# Altium PCB PCB1.PcbDoc
Units mil, origin at the board's own origin, x right, y up, seen from the top; angles counter-clockwise.
Board outline 1245 x 1560 mil, 2 copper layers (Top Layer, Bottom Layer); 11 components, 17 nets, 55 pads, 5 vias.
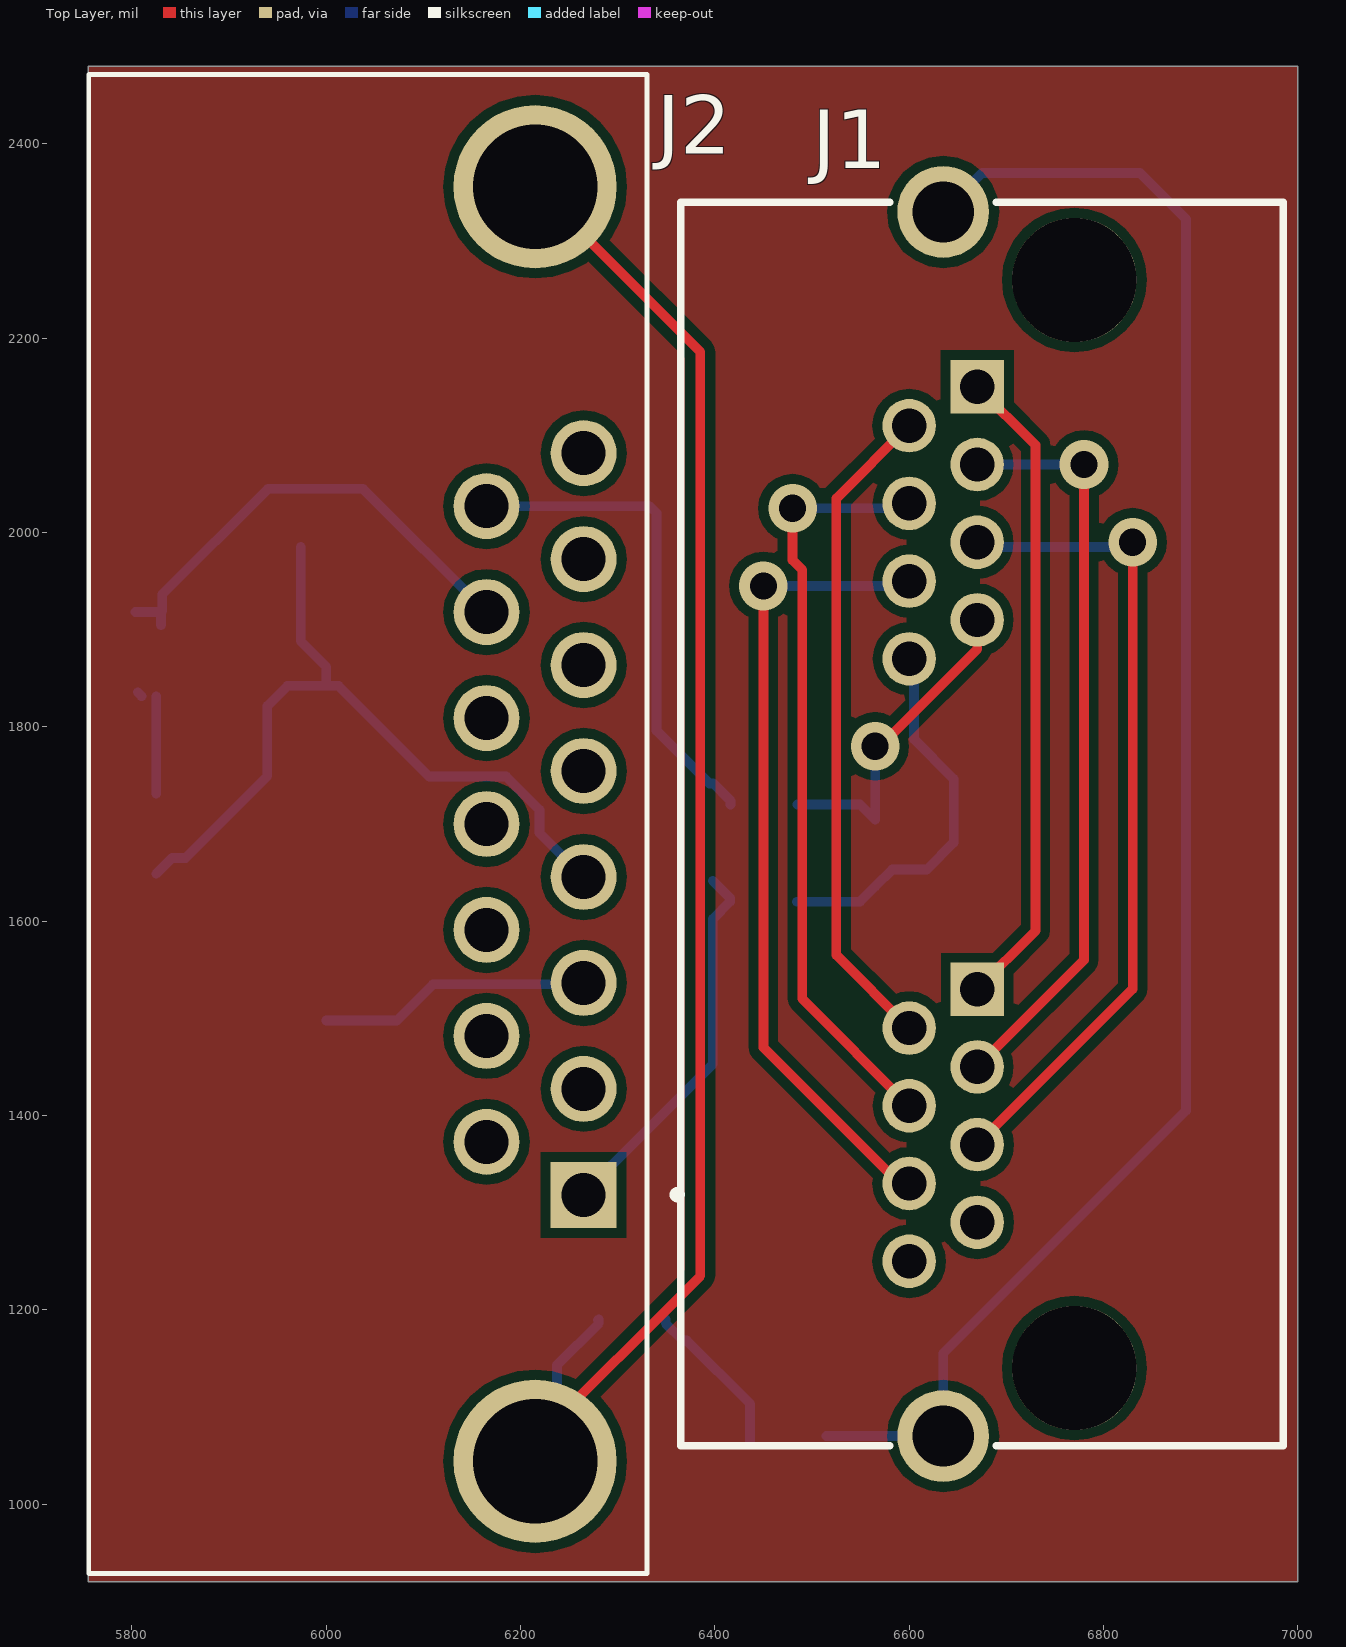
[diagram p0: Top Layer view]
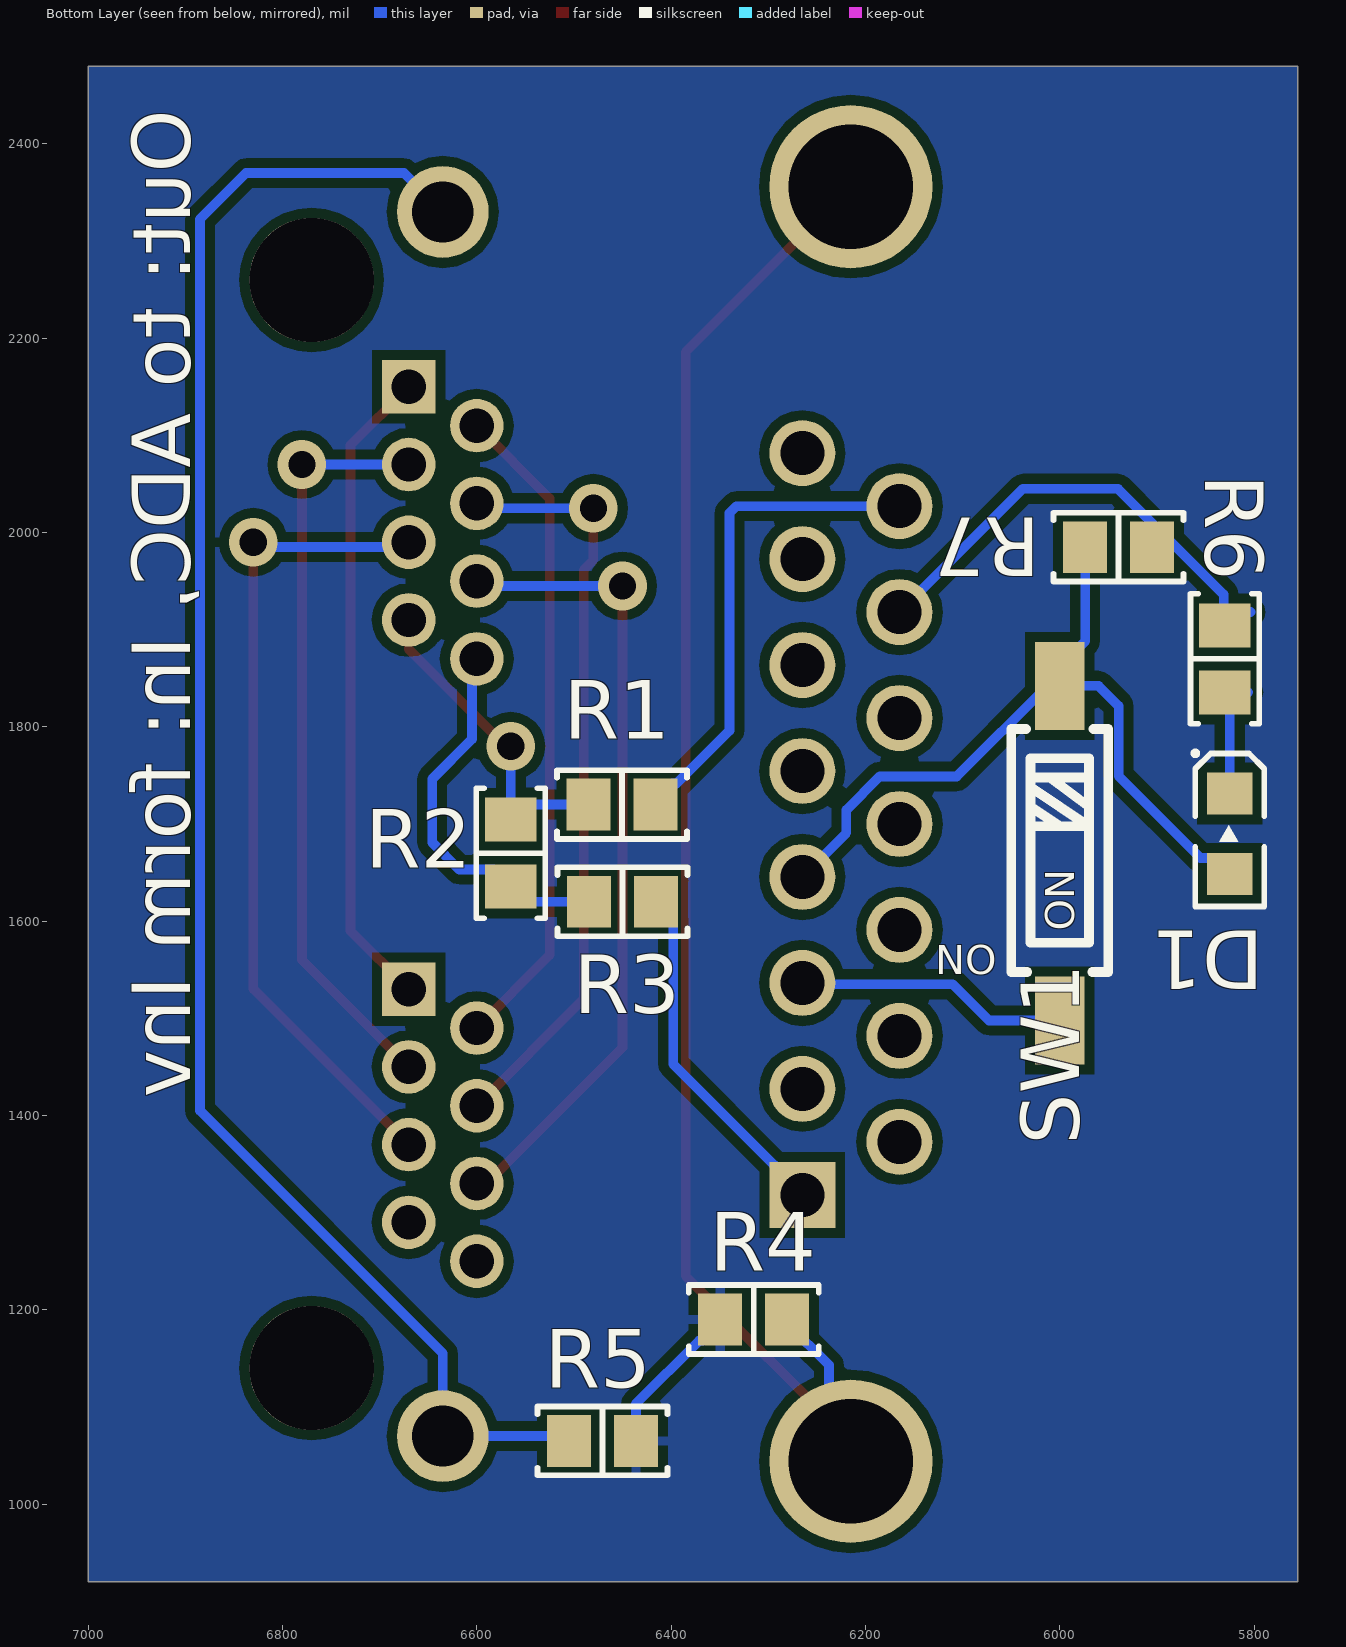
[diagram p1: Bottom Layer view, seen from below]
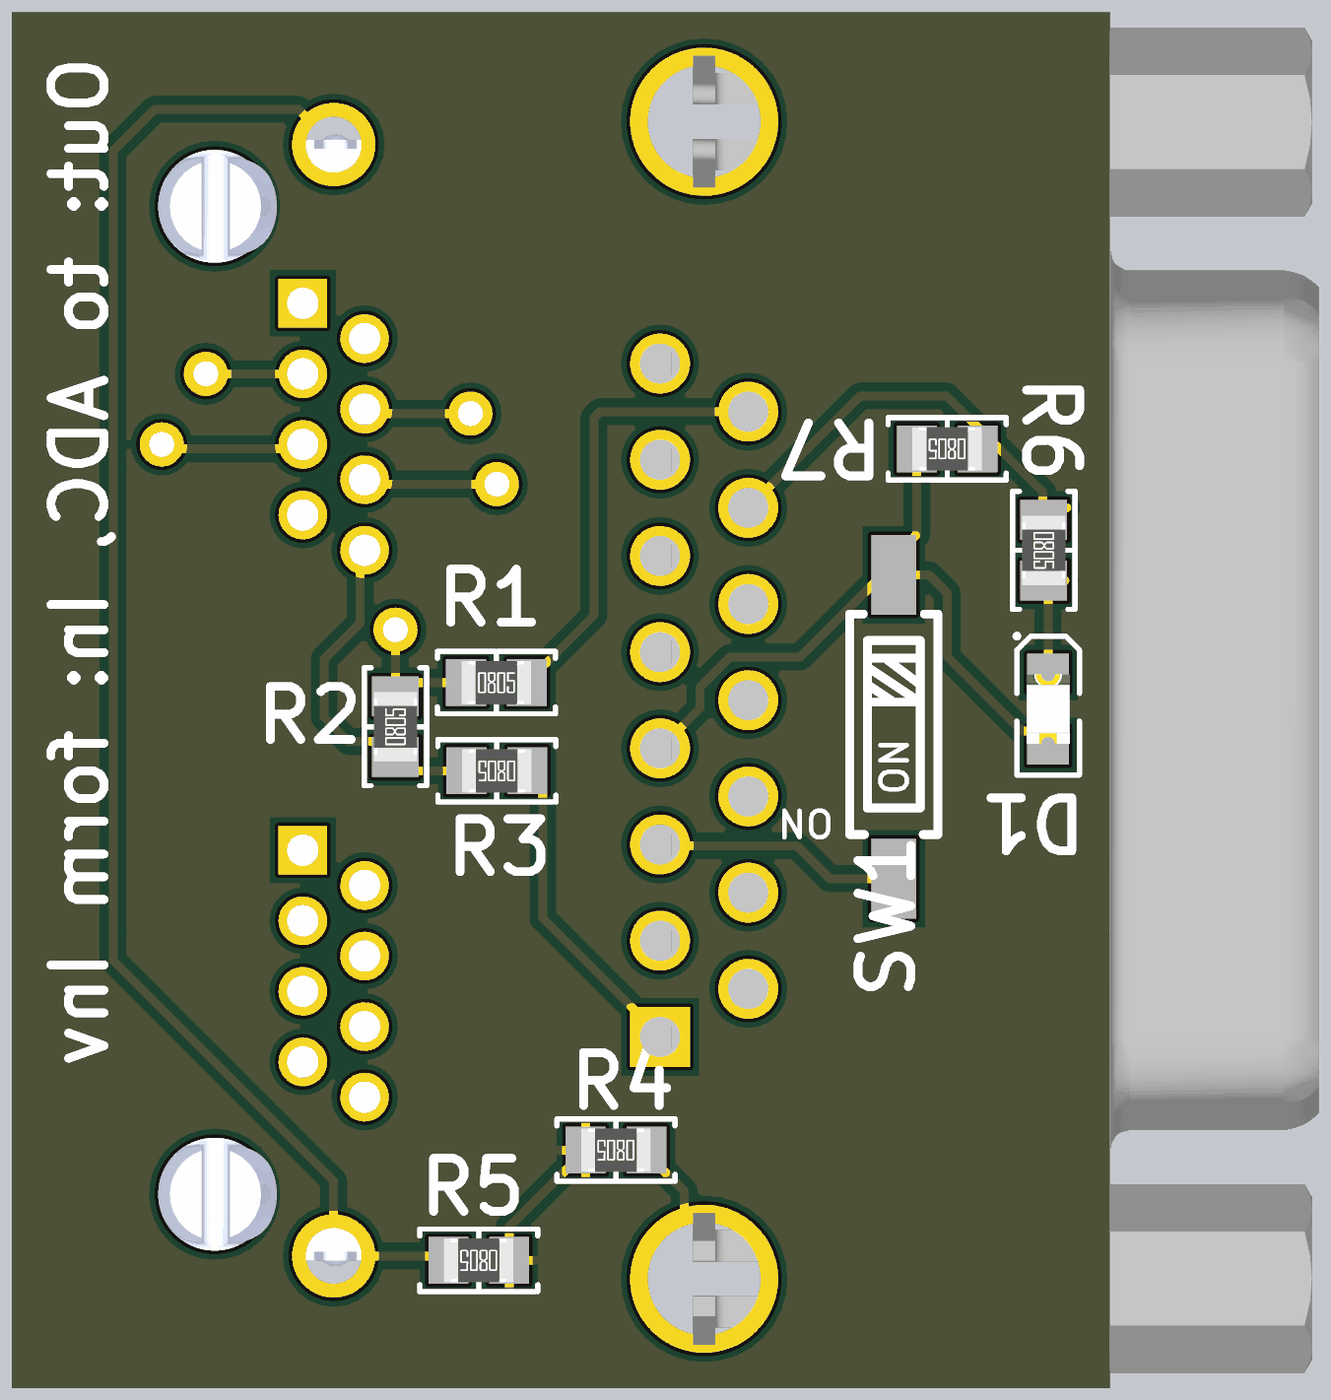
[diagram p2: 3D render of the assembled board from below, using the file's embedded part models]

## Layer stack, top to bottom
Top Solder: solder mask 0.4, Solder Resist, Dk 3.5
Top Layer: signal copper 1.4
Dielectric 1: dielectric 12.6, FR-4, Dk 4.8
Bottom Layer: signal copper 1.4
Bottom Solder: solder mask 0.4, Solder Resist, Dk 3.5

## Board outline
5755,920 7000,920 7000,2480 5755,2480

## Design rules (kind name [scope] priority, off if disabled: settings)
Clearance [All] p1: gap=10 ignorepadtopadclearanceinfootprint=FALSE except(0: Arc-Hole Track-Hole SMDPad-Hole THPad-Hole Via-Hole Fill-Hole Poly-Hole Region-Hole Text-Hole)
HoleSize [All] p1: absolutevalues=TRUE maxlimit=300 minlimit=1 maxpercent=80.000 minpercent=20.000
PolygonConnect [All] p1: connectstyle=Relief reliefconductorwidth=10 reliefentries=4 polygonreliefangle="90 Angle" airgapwidth=10
RoutingVias [All] p1: holewidth=28 width=50 viastyle="Through Hole" minholewidth=28 minwidth=50 maxholewidth=28 maxwidth=50
SolderMaskExpansion [All] p1: expansion=4 istentingtop=FALSE
Width [All] p1: maxlimit=10 minlimit=10 preferedwidth=10
29 further rules are at their usual default settings.

## Classes and differential pairs
component class Schematic: D1 J1 J2 R1 R2 R3 R5 R6 R7 SW1

## Components (designator, comment, footprint, x,y, rotation, side; value= is the part's Value field where it differs from the comment)
D1 "150080GS75000" LEDM2012X80N 5825,1690 r270 bottom
J1 "RJHSE538002" RJHSE-5380-02 6770,1140 r90 top
J2 "SUB-DRBF-607A-002" "PCB - MISC - DSUB15" 6215,1700 r270 top
R1 "10k" "RES 0805_2012" 6450.55,1720 r180 bottom value=11k8
R2 "20k" "RES 0805_2012" 6565,1670 r90 bottom value=11k8
R3 "10k" "RES 0805_2012" 6450,1620 r0 bottom value=11k8
R4 "0R" "RES 0805_2012" 6315,1190 r0 bottom value=11k8
R5 "0R" "RES 0805_2012" 6470.55,1065 r0 bottom value=11k8
R6 "30k" "RES 0805_2012" 5830,1870 r270 bottom value=11k8
R7 "10k" "RES 0805_2012" 5939.45,1985 r0 bottom value=11k8
SW1 "DSIC01LSGET" SW-SMD_DSIC01LSGET 6000,1670 r0 bottom

## Footprints (in the part's own frame and the unit in brackets; to place one, negate y for a bottom-side part, rotate by r counter-clockwise, add the part's x,y. Pads: shape width x height; smd on the part's side, far side on the other; paste and mask are expansions set on the pad)
LEDM2012X80N [mm]
  rect 1.1x1.2 smd: 1(-1.05,0) 2(1.05,0)
  silkscreen extent -2.16,-0.96 1.9,0.9, body extent -1,-0.63 1,0.62, height 0.7
"PCB - MISC - DSUB15" [mm]
  rect 1.725x1.725 / inner round 1.725 / far side rect 1.725x1.725 hole 1.15: 1(9.695,1.27)
  round 1.725 hole 1.15: 2(6.925,1.27) 3(4.155,1.27) 4(1.385,1.27) 5(-1.385,1.27) 6(-4.155,1.27) 7(-6.925,1.27) 8(-9.695,1.27) 9(8.31,-1.27) 10(5.54,-1.27) 11(2.77,-1.27) 12(0,-1.27) 13(-2.77,-1.27) 14(-5.54,-1.27) 15(-8.31,-1.27)
  round 4.266 hole 3.25: S1(-16.66,0) S2(16.66,0)
  silkscreen extent -19.6,-11.67 19.6,3.82, body extent -19.57,-17.7 19.57,2.95, height 13.79
"RES 0805_2012" [mm] "Chip Resistor, 2-Leads, Body 2.00x1.25mm, IPC Medium Density"
  rect 1.15x1.35 smd: 1(-0.875,0) 2(0.875,0)
  silkscreen extent -1.7,-0.9 1.7,0.9, body extent -1,-0.62 1,0.63, height 0.6
RJHSE-5380-02 [mm] "Modular Jack Horizontal Shielded Dual Port 8P8C Tab Up"
  rect 1.4x1.4 hole 0.9: A1(9.906,2.54) B1(25.654,2.54)
  round 1.4 hole 0.9: A2(8.89,4.318) A3(7.874,2.54) A4(6.858,4.318) A5(5.842,2.54) A6(4.826,4.318) A7(3.81,2.54) A8(2.794,4.318) B2(24.638,4.318) B3(23.622,2.54) B4(22.606,4.318) B5(21.59,2.54) B6(20.574,4.318) B7(19.558,2.54) B8(18.542,4.318)
  round 3.25 hole 3.25 unplated: MH1(0,0) MH2(28.448,0)
  round 2.4 hole 1.6: S1(-1.778,3.429) S2(30.226,3.429)
  silkscreen extent -2.03,-5.46 30.48,10.29, body extent -3.5,-5.41 31.95,10.29, height 15.06
SW-SMD_DSIC01LSGET [mm]
  rect 1.3x2.3 smd: 1(0,4.375) 2(0,-4.375)
  silkscreen extent -1.27,-3.24 1.27,3.11, body extent -1.27,-4.65 1.27,4.65, height 2

## Part data
D1: "WL-SMCW SMD Mono-color Chip LED Waterclear Green 0805", Color=green, Device Package=0805, Forward Current I_f="20 mA", Forward Voltage U_f="3.2 V", LCSC Part Number=C2297, Manufacturer="Wuerth Elektronik", Nominal Power="105 mW", Operating Temperature="-40 - 85 °C", Supplier Part Number 1=710-150080GS75000, Component Type="LED Diode", ComponentLink1Description=Datasheet, ComponentLink1URL=https://www.mouser.de/datasheet/2/445/150080GS75000-1715657.pdf, Created from=MGremer, Created On="08.12.2020 10:52:57", Last Updated="03.11.2021 10:28:04", Light Intensity="450 mcd", Live Cycle Status=1, Manufacturer Part Number=150080GS75000, Mounting Type=SMD, PartID=11, Stock number="not stored", Supplier 1=Mouser, Type=Standard, Wavelength="520 nm"
J1: "CAT5, RJ45 Connector, 1x2", Device Package=RJ45, Manufacturer=Amphenol, Supplier Part Number 1=1860605, Component Type="RJ45 Connector", ComponentLink1Description=Datasheet, ComponentLink1URL=https://www.farnell.com/cad/2360382.pdf, Created from=MGremer, Created On="22.02.2021 16:43:38", Last Updated="22.02.2021 16:43:38", Live Cycle Status=1, Manufacturer Part Number=RJHSE538002, Mounting Type=THT, PartID=4, Series=RJHSE, Stock number="not stored", Supplier 1=Farnell, Type="RJ45 Connector"
J2: "15 Female D-Sub Shrouded 2 3A -40℃~+85℃ Plugin D-Sub/DVI/HDMI Connectors ROHS", BOM_JLCPCB Part Class="Extended Part", BOM_Manufacturer=Nextron(台湾正凌), Device Package=THT, LCSC Part Number=C2846090, Manufacturer="Nextron(Nextronics Engineering)", Operating Temperature=-40℃~+85℃, BOM_Manufacturer Part=SUB-DRBF-607A-002, BOM_Supplier=LCSC, BOM_Supplier Part=C2846090, Component Type="DSUB 15 pole female", ComponentLink1Description=Datasheet, ComponentLink1URL=https://jlcpcb.com/partdetail/3039947-SUB_DRBF_607A002/C2846090, Contributor=LCSC, Created from=NDiringer, Created On="17.03.2023 15:40:49", Last Updated="04.05.2023 15:17:49", Live Cycle Status=1, Manufacturer Part Number=SUB-DRBF-607A-002, Mounting Type=SMD, PartID=7, spicePre=D, spiceSymbolName=SUB-DRBF-607A-002, Stock number="not stored", Supplier 1=LCSC, Supplier Part Number 1=C2846090, Type="DSUB 15 pole"
R1 R2 R3 R4 R5 R6 R7: library part ERJ-6ENF1182V, "SMD resistor 1%", Device Package=0805, Manufacturer=Panasonic, Supplier Part Number 1=667-ERJ-6ENF1182V, Tolerance=1%, Component Type="SMD resistor", ComponentLink1Description=Datasheet, ComponentLink1URL=https://www.mouser.de/datasheet/2/315/AOA0000C304-1149620.pdf, Created from=MGremer, Created On="14.12.2020 16:17:14", Last Updated="14.12.2020 18:22:52", Live Cycle Status=1, Manufacturer Part Number=ERJ-6ENF1182V, Mounting Type=SMD, PartID=148, Stock number="not stored", Supplier 1=Mouser, Type=Resistor
SW1: "SPST Black Flat dial, raised type 2.54mm 1 SMD DIP Switches", BOM_JLCPCB Part Class="Extended Part", BOM_Manufacturer=YE, Device Package=SMD,2.5x6mm, Manufacturer="Dongguan Guangzhu Industrial", Operating Temperature="-40 - 85 °C", Supplier Part Number 1=C54948, BOM_Manufacturer Part=DSIC01LSGET, BOM_Supplier=LCSC, BOM_Supplier Part=C54948, Component Type="DIP-Switch; 1p", ComponentLink1Description=Datasheet, ComponentLink1URL=https://jlcpcb.com/parts/2nd/Key_Switch/DIP_Switches_3724, Created from=NDiringer, Created On="27.02.2023 10:43:27", Last Updated="27.02.2023 10:43:27", Live Cycle Status=1, Manufacturer Part Number=DSIC01LSGET, Mounting Type=SMD, PartID=19, spicePre=S, spiceSymbolName=DSIC01LSGET, Supplier 1=LCSC, Type="Dip Switch 1p"

## Via types
v1: diameter 50, hole 28, Top Layer to Bottom Layer, 5 vias

## Nets (pads, with @x,y where several pads share a name; then routed paths per layer and width w, separated by ;. In a path a pad name is that pad's centre, name@x,y a point inside that pad or via, vN(x,y) a via of type N, cw(c..) or ccw(c..) an arc to the next point about the centre after c; other vN are vias at no path point)
DSUB_N1: J2.1 R3.1 | length 392.9
  Bottom Layer w10: J2.1 6293.96,1347.26 6293.96,1348.96 6397.91,1452.91 6397.91,1602.36 R3.1 6415.55,1623.94 R3.1@6397.91,1641.57
DSUB_P1: J2.15 R1.2 | length 511.8
  Bottom Layer w10: J2.15 6332.83,2027.17 6340,2020 6340,1796.1 6394.53,1741.57 6398.46,1741.57 6416.1,1723.94 R1.2
GND: R4.2 R5.1 | length 163.2
  Bottom Layer w10: R4.2 6349.45,1186.06 6367.09,1168.43 6371.02,1168.43 6436.1,1103.35 R5.1
NetD1_1: D1.1 R6.2 | length 105.8
  Bottom Layer w10: R6.2@5806.06,1835.55 R6.2@5810,1831.61 ; D1.1 R6.2@5825,1831.61
NetJ1_A1: J1.A1 J1.B1 | length 669.7
  Top Layer w10: J1.A1 6730,1590 6730,2090 J1.B1
NetJ1_A2: J1.A2 J1.B2 | length 682.1
  Top Layer w10: J1.A2 6525,1565 6525,2035 J1.B2
NetJ1_A3: J1.A3 J1.B3 | length 775.6
  Top Layer w10: J1.A3 6780,1560 v1(6780,2070)
  Bottom Layer w10: J1.B3 v1(6780,2070)
NetJ1_A4: J1.A4 J1.B4 | length 786.8
  Top Layer w10: v1(6480,2025) 6480,1971.57 6490,1961.57 6490,1520 J1.A4
  Bottom Layer w10: v1(6480,2025) 6595,2025 J1.B4
NetJ1_A5: J1.A5 J1.B5 | length 850.4
  Top Layer w10: J1.A5 6830,1530 v1(6830,1990)
  Bottom Layer w10: J1.B5 6675,1985 6825,1985 v1(6830,1990)
NetJ1_A6: J1.A6 J1.B6 | length 835.1
  Top Layer w10: v1(6450,1945) 6450,1470 6590,1330 J1.A6
  Bottom Layer w10: v1(6450,1945) 6595,1945 J1.B6
NetJ1_S1: J1.S1 J1.S2 R5.2 | length 1762.3
  Bottom Layer w10: R5.2@6515,1070 J1.S1 6635,1155 6885,1405 6885,2322.5 6837.5,2370 6675,2370 J1.S2
NetJ2_S1: J2.S1 J2.S2 R4.1 | length 1627
  Top Layer w10: J2.S2 6215,1065 6385,1235 6385,2185.91 J2.S1
  Bottom Layer w10: J2.S2 6237.56,1066.65 6237.56,1143.07 6280.55,1186.06 R4.1 R4.1@6279.65,1189.09
Range_Switchover: D1.2 J2.4 R7.2 SW1.2 | length 811.5
  Bottom Layer w10: D1.2 5841.41,1665.08 5855.08,1665.08 5939.41,1749.41 5939.41,1821.65 5960,1842.24 SW1.2 ; R7.2 5973.9,1888.03 6000,1861.93 SW1.2 ; J2.4 6219.6,1690.87 6219.6,1714.64 6185.28,1748.96 6106.04,1748.96 6012.76,1842.24 SW1.2
RJ_N1: J1.B8 R2.1 R3.2 | length 394.8
  Bottom Layer w10: R3.2 6549.45,1620 R2.1 6582.64,1653.19 6618.19,1653.19 6645.86,1680.86 6645.86,1746.4 6605,1787.25 6605,1865 J1.B8
RJ_P1: J1.B7 R1.1 R2.2 | length 326.3
  Top Layer w10: v1@6575.19,1785 6670,1879.81 J1.B7
  Bottom Layer w10: R1.1 6549.45,1720 R2.2 v1(6565,1780)
Supply+: J2.3 SW1.1 | length 281
  Bottom Layer w10: SW1.1 6072.76,1497.76 6110,1535 6263.58,1535 J2.3
Supply-: J2.14 R6.1 R7.1 | length 490
  Bottom Layer w10: R6.1@5803.66,1918.11 R6.1@5830,1918.11 ; R6.1 R6.1@5830,1918.11 ; J2.14 6038.11,2045 5940,2045 5831.23,1936.23 5831.23,1919.34 R6.1@5830,1918.11
pads on no net: J1.A7 J1.A8 J1.MH1 J1.MH2 J2.2 J2.5 J2.6 J2.7 J2.8 J2.9 J2.10 J2.11 J2.12 J2.13

## Polygon pours and split planes (outlines as drawn)
GND on Bottom Layer "GND_L02_P001" (solid, pour order 1): 5755,920 7000,920 7000,2480 5755,2480
GND on Top Layer "GND_L01_P002" (solid, pour order 2): 5755,2480 7000,2480 7000,920 5755,920

## Silkscreen, mask and mechanical layers (free items; w line width, h text height)
Bottom Overlay:
  text "Out: to ADC, In: form Inv" at 6894.99,2435 h60 r270
Mechanical 1:
  the board outline again, w10

## Dimensions
7000,2480 to 7000,920 on Mechanical 1
5755,2480 to 7000,2480 on Mechanical 1

## Text inside footprints (layer, text, board x,y; h text height)
SW1: Bottom Overlay "ON" at 5985,1590.01 h30 r270; Bottom Overlay "ON" at 6065,1575 h30 r180